# Altium PCB LineSensor32.PcbDoc (part 1 of 2)
Units mm, origin at the board's own origin, x right, y up, seen from the top; angles counter-clockwise.
Board outline 121.58 x 114.54 mm, 2 copper layers (Top Layer, Bottom Layer); 201 components, 111 nets, 642 pads, 221 vias.
Unrouted connection lines stored in the file: 4.
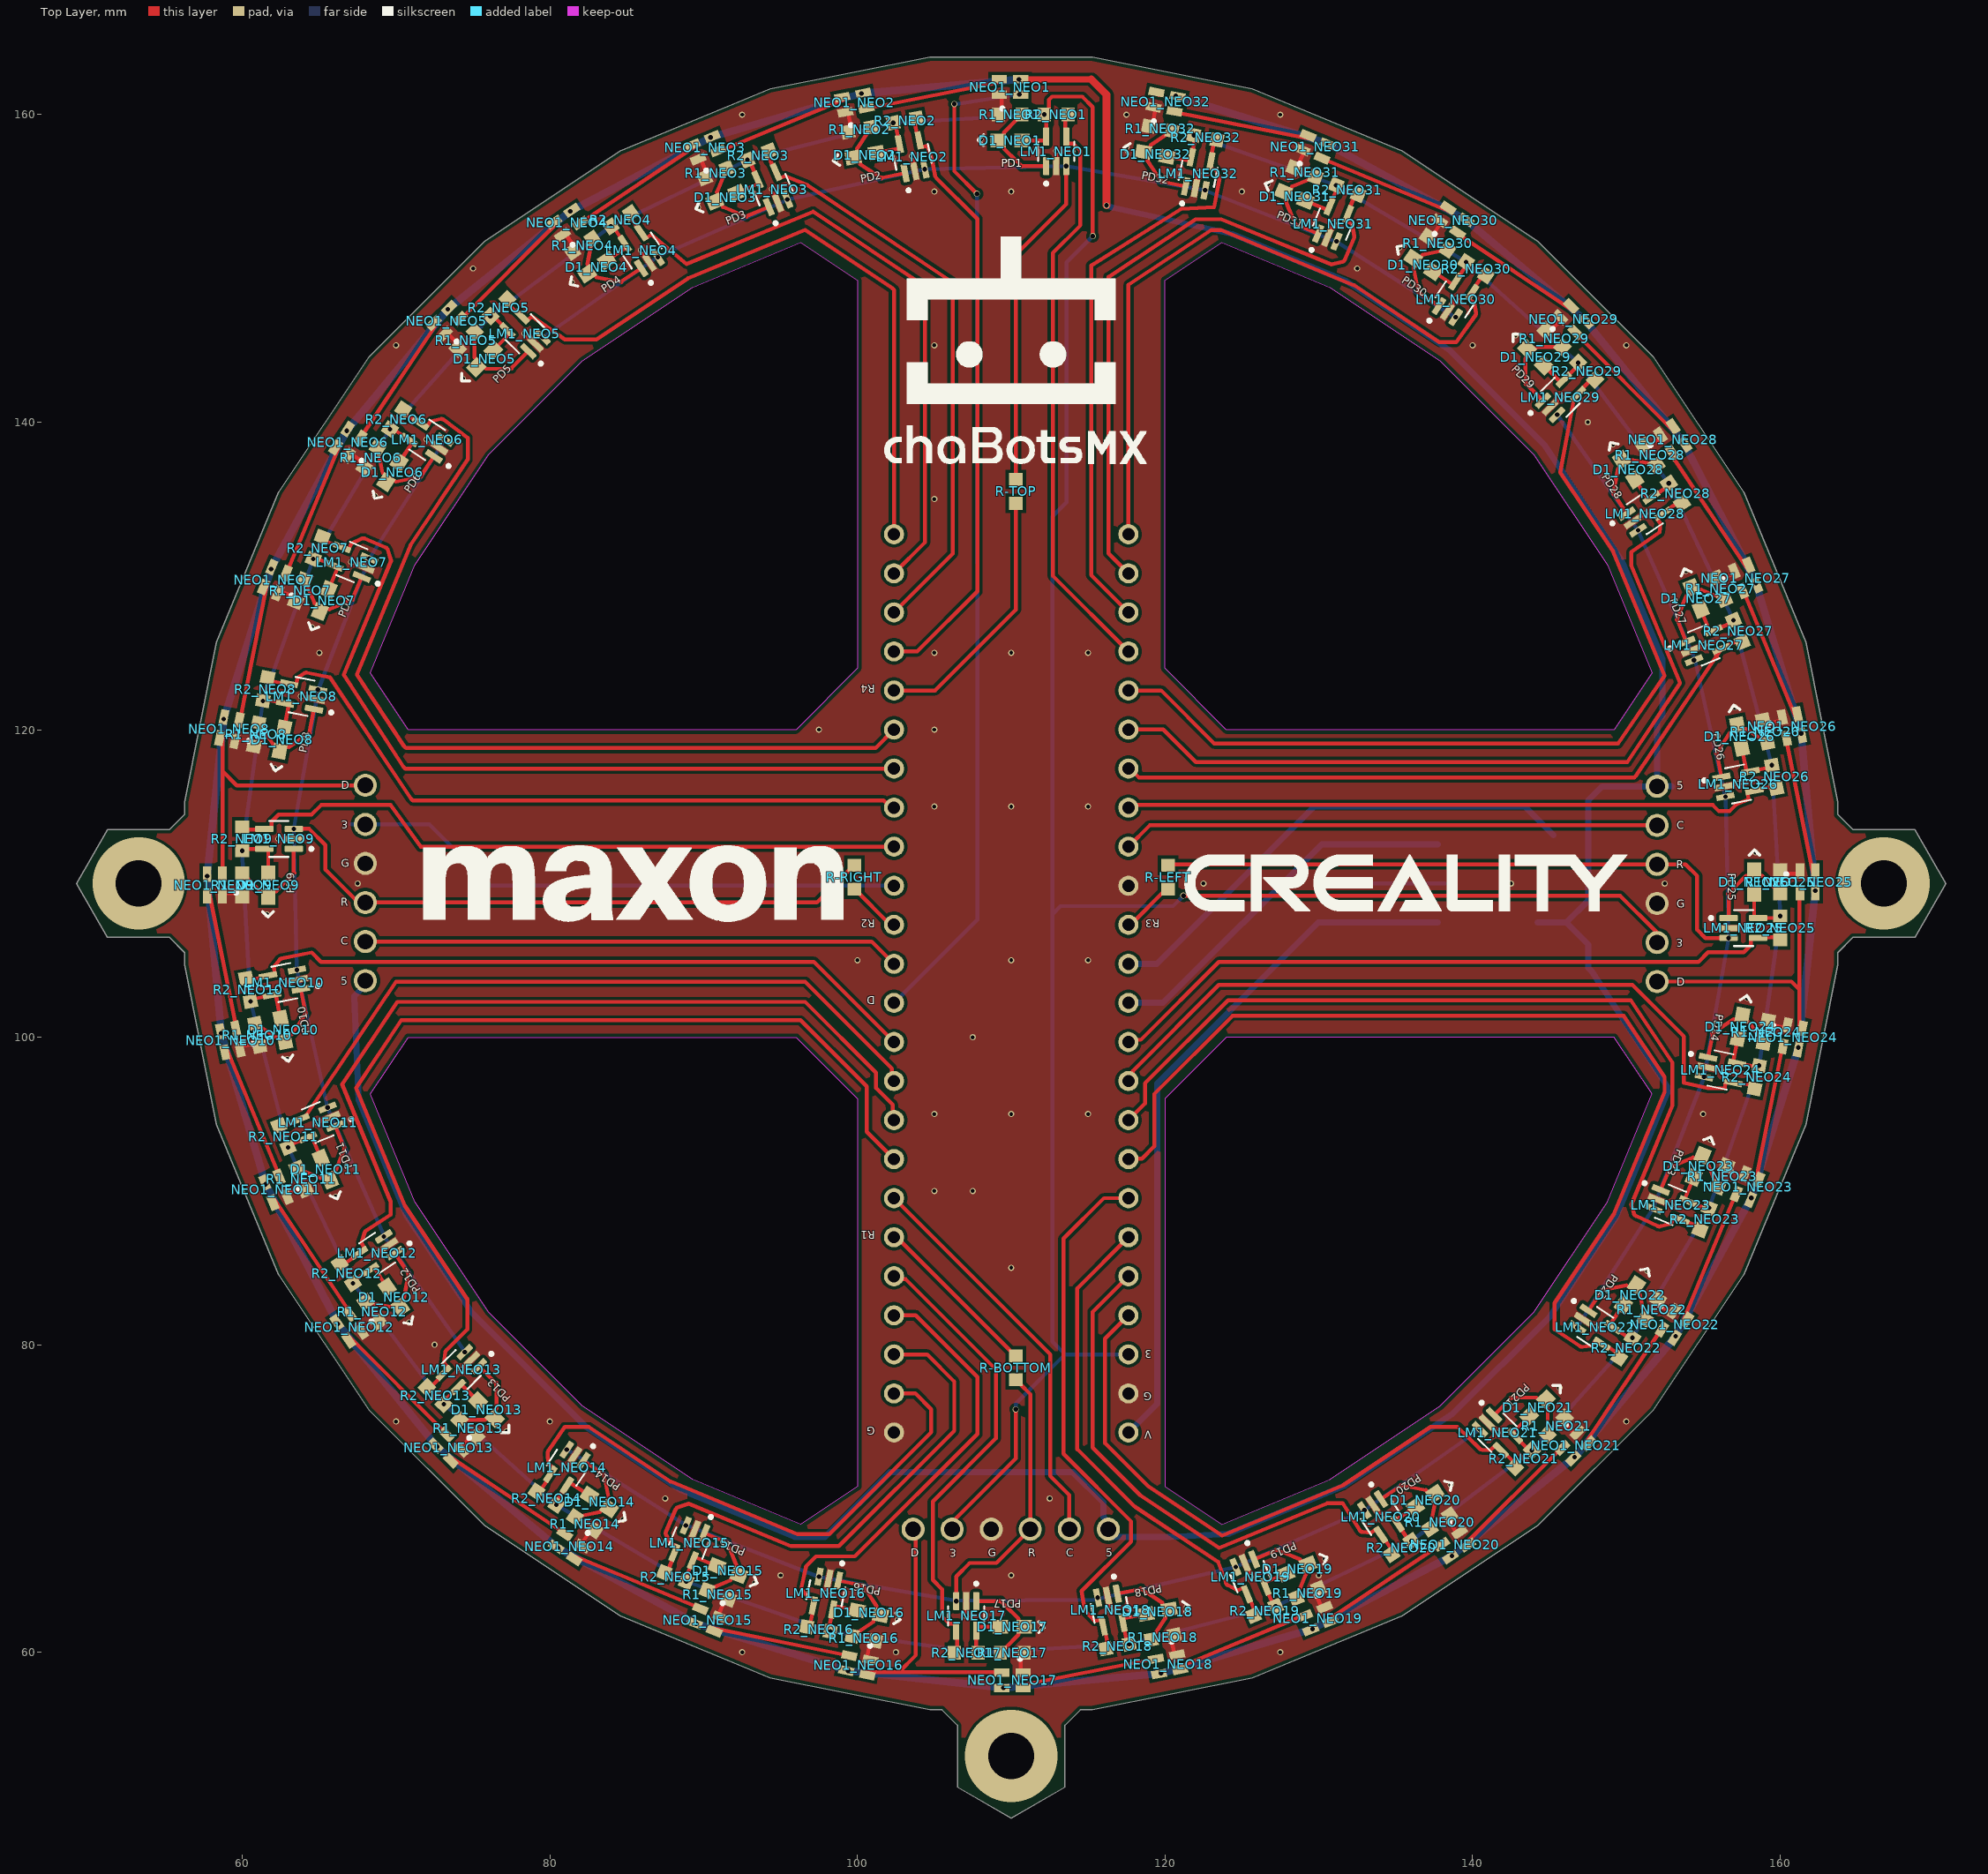
[diagram p0: Top Layer view]
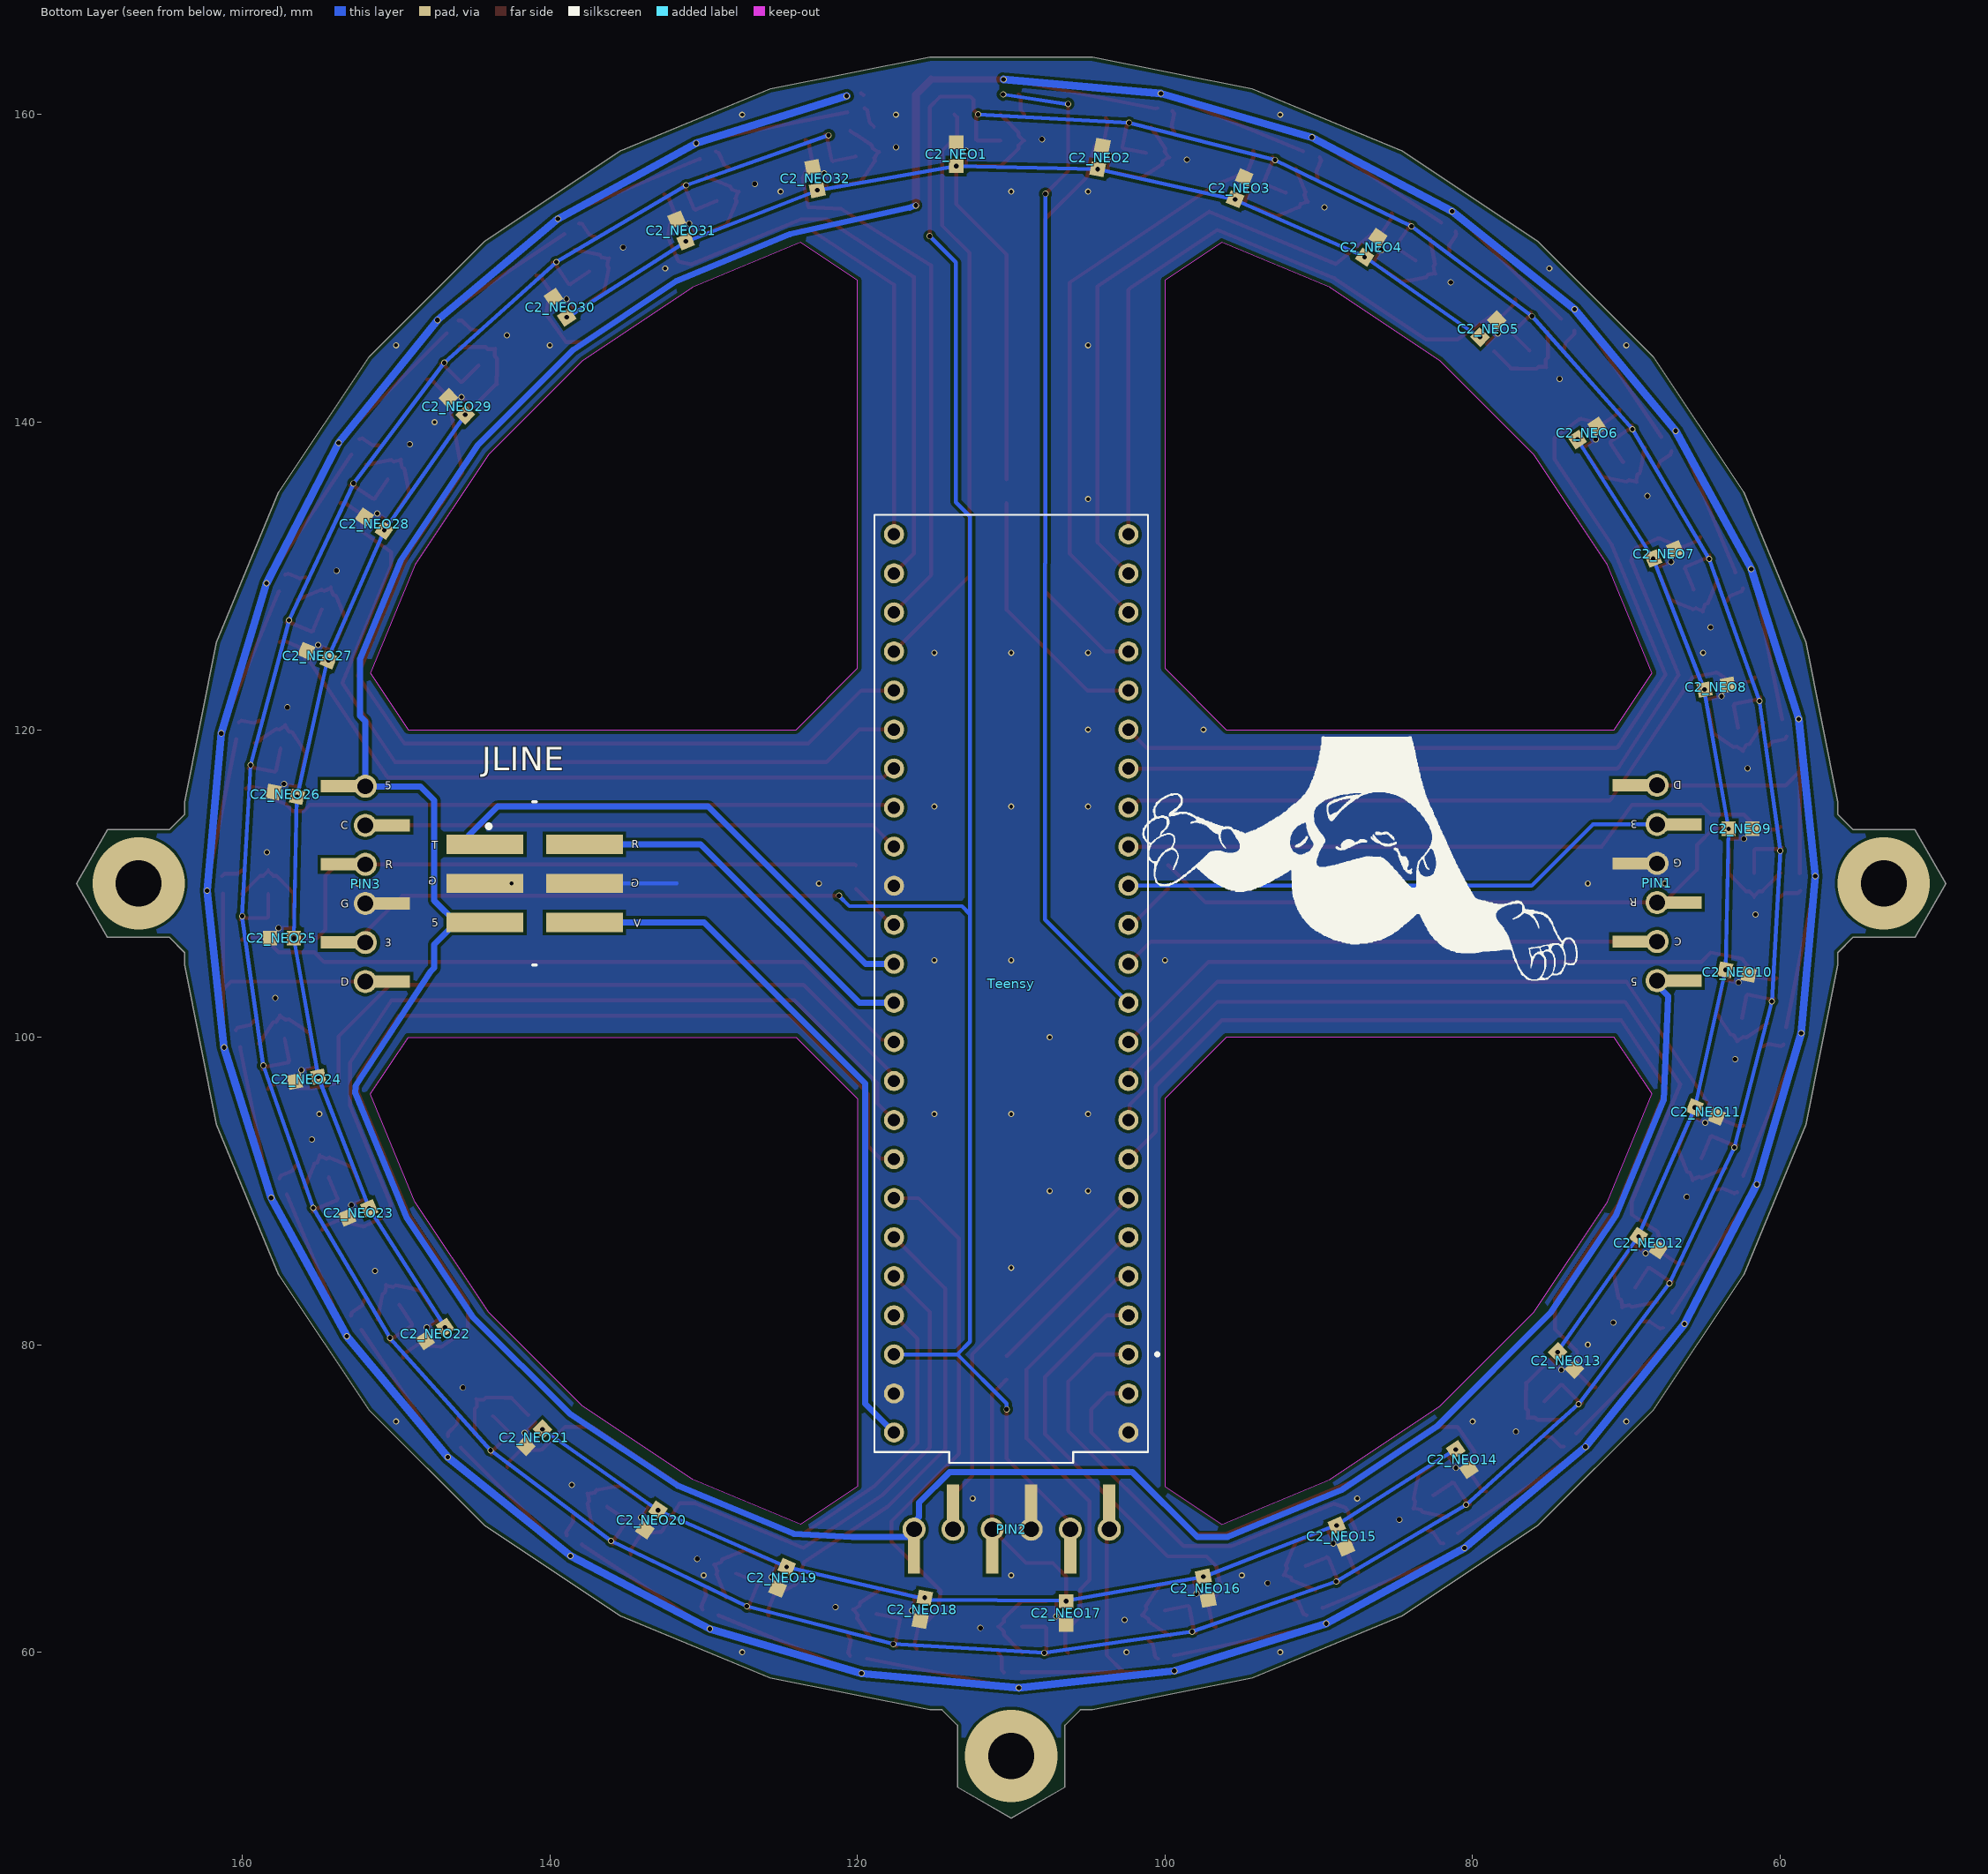
[diagram p1: Bottom Layer view, seen from below]

## Layer stack, top to bottom
Top Solder: solder mask 0.0102, Solder Resist, Dk 3.5
Top Layer: signal copper 0.0356
Dielectric 1: dielectric 0.32, FR-4, Dk 4.8
Bottom Layer: signal copper 0.0356
Bottom Solder: solder mask 0.0102, Solder Resist, Dk 3.5

## Board outline
58.316,94.322 56.25,104.706 56.25,105.5 55.25,106.5 51.229,106.5 49.209,110 51.229,113.5 55.25,113.5 56.25,114.5 56.25,115.294 58.316,125.678 62.367,135.46 68.25,144.264 75.736,151.75 84.54,157.633 94.322,161.684 104.706,163.75 115.294,163.75 125.678,161.684 135.46,157.633 144.264,151.75 151.75,144.264 157.633,135.46 161.684,125.678 163.75,115.294 163.75,114.5 164.75,113.5 168.771,113.5 170.791,110 168.771,106.5 164.75,106.5 163.75,105.5 163.75,104.706 161.684,94.322 157.633,84.54 151.75,75.736 144.264,68.25 135.46,62.367 125.678,58.316 115.294,56.25 114.5,56.25 113.5,55.25 113.5,51.229 110,49.209 106.5,51.229 106.5,55.25 105.5,56.25 104.706,56.25 94.322,58.316 84.54,62.367 75.736,68.25 68.25,75.736 62.367,84.54
cut-out: 124,120 120,124 120,149.216 123.692,151.683 130.723,148.771 137.889,143.983 143.983,137.889 148.771,130.723 151.683,123.692 149.216,120
cut-out: 76.017,82.111 71.229,89.277 68.317,96.308 70.784,100 96,100 100,96 100,70.784 96.308,68.317 89.277,71.229 82.111,76.017
cut-out: 70.784,120 68.317,123.692 71.229,130.723 76.017,137.889 82.111,143.983 89.277,148.771 96.308,151.683 100,149.216 100,124 96,120
cut-out: 120,70.784 123.692,68.317 130.723,71.229 137.889,76.017 143.983,82.111 148.771,89.277 151.683,96.308 149.216,100 124,100 120,96

## Design rules (kind name [scope] priority, off if disabled: settings)
BoardOutlineClearance [All] p1: gap=0.254 ignorepadtopadclearanceinfootprint=FALSE except(0: Arc-SplitContinuation Track-SplitContinuation SMDPad-SplitContinuation THPad-SplitContinuation Via-SplitContinuation Fill-SplitContinuation Poly-SplitContinuation Region-SplitContinuation Text-SplitContinuation)
Clearance [All] p1: gap=0.2 ignorepadtopadclearanceinfootprint=TRUE
PolygonConnect [All] p1: connectstyle=Relief reliefconductorwidth=0.5 reliefentries=4 polygonreliefangle="90 Angle" airgapwidth=0.254
RoomDefinition NEO1 [InComponentClass('NEO1')] p1: confinementstyle=ConfineIn formatcopy=TRUE lockcomponents=FALSE outline 107.425,155.016 114.725,155.016 114.725,163.116 107.425,163.116
RoomDefinition NEO18 [InComponentClass('NEO18')] p2: confinementstyle=ConfineIn formatcopy=TRUE lockcomponents=FALSE outline 121.332,66.356 114.173,64.932 115.753,56.988 122.912,58.412
RoomDefinition NEO4 [InComponentClass('NEO4')] p3: confinementstyle=ConfineIn formatcopy=TRUE lockcomponents=FALSE outline 82.812,145.957 88.882,150.012 84.381,156.747 78.312,152.691
RoomDefinition NEO5 [InComponentClass('NEO5')] p4: confinementstyle=ConfineIn formatcopy=TRUE lockcomponents=FALSE outline 76.328,140.025 81.49,145.187 75.762,150.914 70.6,145.752
RoomDefinition NEO32 [InComponentClass('NEO32')] p5: confinementstyle=ConfineIn formatcopy=TRUE lockcomponents=FALSE outline 116.262,154.678 123.421,153.254 125.002,161.198 117.842,162.622
RoomDefinition NEO31 [InComponentClass('NEO31')] p6: confinementstyle=ConfineIn formatcopy=TRUE lockcomponents=FALSE outline 124.857,152.598 131.602,149.804 134.702,157.288 127.957,160.081
RoomDefinition NEO30 [InComponentClass('NEO30')] p7: confinementstyle=ConfineIn formatcopy=TRUE lockcomponents=FALSE outline 132.882,148.881 138.952,144.825 143.452,151.56 137.383,155.616
RoomDefinition NEO29 [InComponentClass('NEO29')] p8: confinementstyle=ConfineIn formatcopy=TRUE lockcomponents=FALSE outline 139.993,143.67 145.155,138.508 150.882,144.235 145.72,149.397
RoomDefinition NEO28 [InComponentClass('NEO28')] p9: confinementstyle=ConfineIn formatcopy=TRUE lockcomponents=FALSE outline 145.985,137.171 150.041,131.102 156.776,135.602 152.72,141.671
RoomDefinition NEO27 [InComponentClass('NEO27')] p10: confinementstyle=ConfineIn formatcopy=TRUE lockcomponents=FALSE outline 150.535,129.577 153.328,122.833 160.812,125.933 158.018,132.677
RoomDefinition NEO26 [InComponentClass('NEO26')] p11: confinementstyle=ConfineIn formatcopy=TRUE lockcomponents=FALSE outline 153.639,121.357 155.063,114.197 163.007,115.777 161.583,122.937
RoomDefinition NEO25 [InComponentClass('NEO25')] p12: confinementstyle=ConfineIn formatcopy=TRUE lockcomponents=FALSE outline 155.016,112.6 155.016,105.3 163.116,105.3 163.116,112.6
RoomDefinition NEO24 [InComponentClass('NEO24')] p13: confinementstyle=ConfineIn formatcopy=TRUE lockcomponents=FALSE outline 154.658,103.768 153.234,96.608 161.178,95.028 162.603,102.188
RoomDefinition NEO23 [InComponentClass('NEO23')] p14: confinementstyle=ConfineIn formatcopy=TRUE lockcomponents=FALSE outline 152.584,95.175 149.791,88.431 157.274,85.331 160.068,92.075
RoomDefinition NEO22 [InComponentClass('NEO22')] p15: confinementstyle=ConfineIn formatcopy=TRUE lockcomponents=FALSE outline 148.874,87.152 144.818,81.083 151.553,76.582 155.609,82.652
RoomDefinition NEO21 [InComponentClass('NEO21')] p16: confinementstyle=ConfineIn formatcopy=TRUE lockcomponents=FALSE outline 143.67,80.007 138.508,74.845 144.235,69.118 149.397,74.28
RoomDefinition NEO20 [InComponentClass('NEO20')] p17: confinementstyle=ConfineIn formatcopy=TRUE lockcomponents=FALSE outline 137.171,74.015 131.102,69.959 135.602,63.224 141.671,67.28
RoomDefinition NEO19 [InComponentClass('NEO19')] p18: confinementstyle=ConfineIn formatcopy=TRUE lockcomponents=FALSE outline 129.652,69.415 122.908,66.622 126.007,59.138 132.752,61.932
RoomDefinition NEO17 [InComponentClass('NEO17')] p19: confinementstyle=ConfineIn formatcopy=TRUE lockcomponents=FALSE outline 112.575,64.959 105.275,64.959 105.275,56.859 112.575,56.859
RoomDefinition NEO16 [InComponentClass('NEO16')] p20: confinementstyle=ConfineIn formatcopy=TRUE lockcomponents=FALSE outline 103.856,65.298 96.702,66.751 95.09,58.813 102.244,57.36
RoomDefinition NEO15 [InComponentClass('NEO15')] p21: confinementstyle=ConfineIn formatcopy=TRUE lockcomponents=FALSE outline 95.143,67.402 88.398,70.196 85.298,62.712 92.043,59.919
RoomDefinition NEO14 [InComponentClass('NEO14')] p22: confinementstyle=ConfineIn formatcopy=TRUE lockcomponents=FALSE outline 87.118,71.119 81.048,75.175 76.548,68.44 82.617,64.384
RoomDefinition NEO13 [InComponentClass('NEO13')] p23: confinementstyle=ConfineIn formatcopy=TRUE lockcomponents=FALSE outline 79.972,76.33 74.81,81.492 69.083,75.765 74.244,70.603
RoomDefinition NEO12 [InComponentClass('NEO12')] p24: confinementstyle=ConfineIn formatcopy=TRUE lockcomponents=FALSE outline 73.98,82.836 69.925,88.905 63.19,84.405 67.245,78.335
RoomDefinition NEO11 [InComponentClass('NEO11')] p25: confinementstyle=ConfineIn formatcopy=TRUE lockcomponents=FALSE outline 69.406,90.371 66.612,97.115 59.129,94.016 61.922,87.271
RoomDefinition NEO10 [InComponentClass('NEO10')] p26: confinementstyle=ConfineIn formatcopy=TRUE lockcomponents=FALSE outline 66.356,98.668 64.932,105.827 56.988,104.247 58.412,97.088
RoomDefinition NEO9 [InComponentClass('NEO9')] p27: confinementstyle=ConfineIn formatcopy=TRUE lockcomponents=FALSE outline 64.984,107.4 64.984,114.7 56.884,114.7 56.884,107.4
RoomDefinition NEO8 [InComponentClass('NEO8')] p28: confinementstyle=ConfineIn formatcopy=TRUE lockcomponents=FALSE outline 65.322,116.262 66.746,123.421 58.802,125.002 57.378,117.842
RoomDefinition NEO7 [InComponentClass('NEO7')] p29: confinementstyle=ConfineIn formatcopy=TRUE lockcomponents=FALSE outline 67.416,124.825 70.209,131.569 62.726,134.669 59.932,127.925
RoomDefinition NEO6 [InComponentClass('NEO6')] p30: confinementstyle=ConfineIn formatcopy=TRUE lockcomponents=FALSE outline 71.125,132.837 75.182,138.906 68.448,143.408 64.391,137.339
RoomDefinition NEO3 [InComponentClass('NEO3')] p31: confinementstyle=ConfineIn formatcopy=TRUE lockcomponents=FALSE outline 90.385,150.627 97.129,153.42 94.029,160.904 87.285,158.11
RoomDefinition NEO2 [InComponentClass('NEO2')] p32: confinementstyle=ConfineIn formatcopy=TRUE lockcomponents=FALSE outline 98.668,153.644 105.827,155.068 104.247,163.013 97.087,161.588
RoutingVias [All] p1: holewidth=0.711 width=1.27 viastyle="Through Hole" minholewidth=0.711 minwidth=1.27 maxholewidth=0.711 maxwidth=1.27
SolderMaskExpansion [All] p1: expansion=0.102 istentingtop=FALSE
SupplyNets "Schematic Supply Nets_5" [InNet('+BAT')] p1: voltage=0.000
SupplyNets "Schematic Supply Nets_4" [InNet('+3V3')] p2: voltage=0.000
SupplyNets "Schematic Supply Nets_2" [InNet('+VREF')] p3: voltage=0.000
SupplyNets "Schematic Supply Nets_1" [InNet('GND')] p4: voltage=0.000
SupplyNets "Schematic Supply Nets" [InNet('+5V')] p5: voltage=0.000
Width [All] p1: maxlimit=1 minlimit=0.254 preferedwidth=0.254
30 further rules are at their usual default settings.

## Classes and differential pairs
net class COMP[1..32]: COMP1 COMP2 COMP3 COMP4 COMP5 COMP6 COMP7 COMP8 COMP9 COMP10 COMP11 COMP12 COMP13 COMP14 COMP15 COMP16 COMP17 COMP18 COMP19 COMP20 COMP21 COMP22 COMP23 COMP24 COMP25 COMP26 COMP27 COMP28 COMP29 COMP30 COMP31 COMP32
component class Main: JLINE PIN1 PIN2 PIN3 R-BOTTOM R-LEFT R-RIGHT R-TOP Teensy
net class DIN[2..32]: DIN2 DIN3 DIN4 DIN5 DIN6 DIN7 DIN8 DIN9 DIN10 DIN11 DIN12 DIN13 DIN14 DIN15 DIN16 DIN17 DIN18 DIN19 DIN20 DIN21 DIN22 DIN23 DIN24 DIN25 DIN26 DIN27 DIN28 DIN29 DIN30 DIN31 DIN32
component class NEO32: C2_NEO32 D1_NEO32 LM1_NEO32 NEO1_NEO32 R1_NEO32 R2_NEO32
component class NEO31: C2_NEO31 D1_NEO31 LM1_NEO31 NEO1_NEO31 R1_NEO31 R2_NEO31
component class NEO30: C2_NEO30 D1_NEO30 LM1_NEO30 NEO1_NEO30 R1_NEO30 R2_NEO30
component class NEO29: C2_NEO29 D1_NEO29 LM1_NEO29 NEO1_NEO29 R1_NEO29 R2_NEO29
component class NEO28: C2_NEO28 D1_NEO28 LM1_NEO28 NEO1_NEO28 R1_NEO28 R2_NEO28
component class NEO27: C2_NEO27 D1_NEO27 LM1_NEO27 NEO1_NEO27 R1_NEO27 R2_NEO27
component class NEO26: C2_NEO26 D1_NEO26 LM1_NEO26 NEO1_NEO26 R1_NEO26 R2_NEO26
component class NEO25: C2_NEO25 D1_NEO25 LM1_NEO25 NEO1_NEO25 R1_NEO25 R2_NEO25
component class NEO24: C2_NEO24 D1_NEO24 LM1_NEO24 NEO1_NEO24 R1_NEO24 R2_NEO24
component class NEO23: C2_NEO23 D1_NEO23 LM1_NEO23 NEO1_NEO23 R1_NEO23 R2_NEO23
component class NEO22: C2_NEO22 D1_NEO22 LM1_NEO22 NEO1_NEO22 R1_NEO22 R2_NEO22
component class NEO21: C2_NEO21 D1_NEO21 LM1_NEO21 NEO1_NEO21 R1_NEO21 R2_NEO21
component class NEO20: C2_NEO20 D1_NEO20 LM1_NEO20 NEO1_NEO20 R1_NEO20 R2_NEO20
component class NEO19: C2_NEO19 D1_NEO19 LM1_NEO19 NEO1_NEO19 R1_NEO19 R2_NEO19
component class NEO18: C2_NEO18 D1_NEO18 LM1_NEO18 NEO1_NEO18 R1_NEO18 R2_NEO18
component class NEO17: C2_NEO17 D1_NEO17 LM1_NEO17 NEO1_NEO17 R1_NEO17 R2_NEO17
component class NEO16: C2_NEO16 D1_NEO16 LM1_NEO16 NEO1_NEO16 R1_NEO16 R2_NEO16
component class NEO15: C2_NEO15 D1_NEO15 LM1_NEO15 NEO1_NEO15 R1_NEO15 R2_NEO15
component class NEO14: C2_NEO14 D1_NEO14 LM1_NEO14 NEO1_NEO14 R1_NEO14 R2_NEO14
component class NEO13: C2_NEO13 D1_NEO13 LM1_NEO13 NEO1_NEO13 R1_NEO13 R2_NEO13
component class NEO12: C2_NEO12 D1_NEO12 LM1_NEO12 NEO1_NEO12 R1_NEO12 R2_NEO12
component class NEO11: C2_NEO11 D1_NEO11 LM1_NEO11 NEO1_NEO11 R1_NEO11 R2_NEO11
component class NEO10: C2_NEO10 D1_NEO10 LM1_NEO10 NEO1_NEO10 R1_NEO10 R2_NEO10
component class NEO9: C2_NEO9 D1_NEO9 LM1_NEO9 NEO1_NEO9 R1_NEO9 R2_NEO9
component class NEO8: C2_NEO8 D1_NEO8 LM1_NEO8 NEO1_NEO8 R1_NEO8 R2_NEO8
component class NEO7: C2_NEO7 D1_NEO7 LM1_NEO7 NEO1_NEO7 R1_NEO7 R2_NEO7
component class NEO6: C2_NEO6 D1_NEO6 LM1_NEO6 NEO1_NEO6 R1_NEO6 R2_NEO6
component class NEO5: C2_NEO5 D1_NEO5 LM1_NEO5 NEO1_NEO5 R1_NEO5 R2_NEO5
component class NEO4: C2_NEO4 D1_NEO4 LM1_NEO4 NEO1_NEO4 R1_NEO4 R2_NEO4
channel class Neopixels: NEO1 NEO2 NEO3 NEO4 NEO5 NEO6 NEO7 NEO8 NEO9 NEO10 NEO11 NEO12 NEO13 NEO14 NEO15 NEO16 NEO17 NEO18 NEO19 NEO20 NEO21 NEO22 NEO23 NEO24 NEO25 NEO26 NEO27 NEO28 NEO29 NEO30 NEO31 NEO32
component class NEO3: C2_NEO3 D1_NEO3 LM1_NEO3 NEO1_NEO3 R1_NEO3 R2_NEO3
component class NEO2: C2_NEO2 D1_NEO2 LM1_NEO2 NEO1_NEO2 R1_NEO2 R2_NEO2
component class NEO1: C2_NEO1 D1_NEO1 LM1_NEO1 NEO1_NEO1 R1_NEO1 R2_NEO1

## Components (designator, comment, footprint, x,y, rotation, side; value= is the part's Value field where it differs from the comment)
C2_NEO1 "1UF" CAP_0603 113.575,157.431 r270 bottom (schematic designator C2)
C2_NEO2 "1UF" CAP_0603 104.228,157.213 r281.25 bottom (schematic designator C2)
C2_NEO3 "1UF" CAP_0603 95.142,155.212 r292.5 bottom (schematic designator C2)
C2_NEO4 "1UF" CAP_0603 86.584,151.381 r303.75 bottom (schematic designator C2)
C2_NEO5 "1UF" CAP_0603 78.969,146.081 r315 bottom (schematic designator C2)
C2_NEO6 "1UF" CAP_0603 72.535,139.292 r326.24 bottom (schematic designator C2)
C2_NEO7 "1UF" CAP_0603 67.538,131.431 r337.5 bottom (schematic designator C2)
C2_NEO8 "1UF" CAP_0603 64.153,122.765 r348.75 bottom (schematic designator C2)
C2_NEO9 "1UF" CAP_0603 62.569,113.55 r0 bottom (schematic designator C2)
C2_NEO10 "1UF" CAP_0603 62.788,104.228 r11.25 bottom (schematic designator C2)
C2_NEO11 "1UF" CAP_0603 64.821,95.129 r22.5 bottom (schematic designator C2)
C2_NEO12 "1UF" CAP_0603 68.556,86.607 r33.75 bottom (schematic designator C2)
C2_NEO13 "1UF" CAP_0603 73.916,78.971 r45 bottom (schematic designator C2)
C2_NEO14 "1UF" CAP_0603 80.662,72.528 r56.25 bottom (schematic designator C2)
C2_NEO15 "1UF" CAP_0603 88.537,67.524 r67.5 bottom (schematic designator C2)
C2_NEO16 "1UF" CAP_0603 97.349,64.156 r78.52 bottom (schematic designator C2)
C2_NEO17 "1UF" CAP_0603 106.425,62.544 r90 bottom (schematic designator C2)
C2_NEO18 "1UF" CAP_0603 115.772,62.788 r101.25 bottom (schematic designator C2)
C2_NEO19 "1UF" CAP_0603 124.894,64.831 r112.5 bottom (schematic designator C2)
C2_NEO20 "1UF" CAP_0603 133.4,68.59 r123.75 bottom (schematic designator C2)
C2_NEO21 "1UF" CAP_0603 141.029,73.951 r135 bottom (schematic designator C2)
C2_NEO22 "1UF" CAP_0603 147.465,80.697 r146.25 bottom (schematic designator C2)
C2_NEO23 "1UF" CAP_0603 152.462,88.569 r157.5 bottom (schematic designator C2)
C2_NEO24 "1UF" CAP_0603 155.827,97.265 r168.75 bottom (schematic designator C2)
C2_NEO25 "1UF" CAP_0603 157.431,106.45 r180 bottom (schematic designator C2)
C2_NEO26 "1UF" CAP_0603 157.207,115.796 r191.25 bottom (schematic designator C2)
C2_NEO27 "1UF" CAP_0603 155.119,124.819 r202.5 bottom (schematic designator C2)
C2_NEO28 "1UF" CAP_0603 151.41,133.4 r213.75 bottom (schematic designator C2)
C2_NEO29 "1UF" CAP_0603 146.049,141.029 r225 bottom (schematic designator C2)
C2_NEO30 "1UF" CAP_0603 139.338,147.472 r236.25 bottom (schematic designator C2)
C2_NEO31 "1UF" CAP_0603 131.464,152.476 r247.5 bottom (schematic designator C2)
C2_NEO32 "1UF" CAP_0603 122.765,155.847 r258.75 bottom (schematic designator C2)
D1_NEO1 "ALS-PT19" ALS-PT19 109.925,158.316 r180 top (schematic designator D1)
D1_NEO2 "ALS-PT19" ALS-PT19 100.476,157.368 r191.25 top (schematic designator D1)
D1_NEO3 "ALS-PT19" ALS-PT19 91.431,154.632 r202.5 top (schematic designator D1)
D1_NEO4 "ALS-PT19" ALS-PT19 83.057,150.089 r213.75 top (schematic designator D1)
D1_NEO5 "ALS-PT19" ALS-PT19 75.762,144.126 r225 top (schematic designator D1)
D1_NEO6 "ALS-PT19" ALS-PT19 69.771,136.75 r236.24 top (schematic designator D1)
D1_NEO7 "ALS-PT19" ALS-PT19 65.324,128.397 r247.5 top (schematic designator D1)
D1_NEO8 "ALS-PT19" ALS-PT19 62.573,119.357 r258.75 top (schematic designator D1)
D1_NEO9 "ALS-PT19" ALS-PT19 61.684,109.9 r270 top (schematic designator D1)
D1_NEO10 "ALS-PT19" ALS-PT19 62.632,100.476 r281.25 top (schematic designator D1)
D1_NEO11 "ALS-PT19" ALS-PT19 65.4,91.418 r292.5 top (schematic designator D1)
D1_NEO12 "ALS-PT19" ALS-PT19 69.848,83.081 r303.75 top (schematic designator D1)
D1_NEO13 "ALS-PT19" ALS-PT19 75.871,75.765 r315 top (schematic designator D1)
D1_NEO14 "ALS-PT19" ALS-PT19 83.206,69.764 r326.25 top (schematic designator D1)
D1_NEO15 "ALS-PT19" ALS-PT19 91.57,65.31 r337.5 top (schematic designator D1)
D1_NEO16 "ALS-PT19" ALS-PT19 100.749,62.562 r348.52 top (schematic designator D1)
D1_NEO17 "ALS-PT19" ALS-PT19 110.075,61.659 r0 top (schematic designator D1)
D1_NEO18 "ALS-PT19" ALS-PT19 119.524,62.632 r11.25 top (schematic designator D1)
D1_NEO19 "ALS-PT19" ALS-PT19 128.605,65.41 r22.5 top (schematic designator D1)
D1_NEO20 "ALS-PT19" ALS-PT19 136.926,69.882 r33.75 top (schematic designator D1)
D1_NEO21 "ALS-PT19" ALS-PT19 144.235,75.906 r45 top (schematic designator D1)
D1_NEO22 "ALS-PT19" ALS-PT19 150.229,83.24 r56.25 top (schematic designator D1)
D1_NEO23 "ALS-PT19" ALS-PT19 154.676,91.603 r67.5 top (schematic designator D1)
D1_NEO24 "ALS-PT19" ALS-PT19 157.407,100.672 r78.75 top (schematic designator D1)
D1_NEO25 "ALS-PT19" ALS-PT19 158.316,110.1 r90 top (schematic designator D1)
D1_NEO26 "ALS-PT19" ALS-PT19 157.363,119.549 r101.25 top (schematic designator D1)
D1_NEO27 "ALS-PT19" ALS-PT19 154.54,128.53 r112.5 top (schematic designator D1)
D1_NEO28 "ALS-PT19" ALS-PT19 150.118,136.926 r123.75 top (schematic designator D1)
D1_NEO29 "ALS-PT19" ALS-PT19 144.094,144.235 r135 top (schematic designator D1)
D1_NEO30 "ALS-PT19" ALS-PT19 136.794,150.236 r146.25 top (schematic designator D1)
D1_NEO31 "ALS-PT19" ALS-PT19 128.43,154.69 r157.5 top (schematic designator D1)
D1_NEO32 "ALS-PT19" ALS-PT19 119.357,157.427 r168.75 top (schematic designator D1)
JLINE "IDC-6PIN-SMT-2.54_1_1" IDC-6PIN-SMT-2.54 141,110 r180 bottom
LM1_NEO1 "LMV331" LMV331 112.925,157.616 r90 top (schematic designator LM1)
LM1_NEO2 "LMV331" LMV331 103.555,157.267 r101.25 top (schematic designator LM1)
LM1_NEO3 "LMV331" LMV331 94.471,155.134 r112.5 top (schematic designator LM1)
LM1_NEO4 "LMV331" LMV331 85.94,151.174 r123.75 top (schematic designator LM1)
LM1_NEO5 "LMV331" LMV331 78.378,145.752 r135 top (schematic designator LM1)
LM1_NEO6 "LMV331" LMV331 72.02,138.855 r146.24 top (schematic designator LM1)
LM1_NEO7 "LMV331" LMV331 67.118,130.901 r157.5 top (schematic designator LM1)
LM1_NEO8 "LMV331" LMV331 63.845,122.163 r168.75 top (schematic designator LM1)
LM1_NEO9 "LMV331" LMV331 62.384,112.9 r180 top (schematic designator LM1)
LM1_NEO10 "LMV331" LMV331 62.733,103.555 r191.25 top (schematic designator LM1)
LM1_NEO11 "LMV331" LMV331 64.899,94.457 r202.5 top (schematic designator LM1)
LM1_NEO12 "LMV331" LMV331 68.763,85.964 r213.75 top (schematic designator LM1)
LM1_NEO13 "LMV331" LMV331 74.244,78.381 r225 top (schematic designator LM1)
LM1_NEO14 "LMV331" LMV331 81.1,72.013 r236.25 top (schematic designator LM1)
LM1_NEO15 "LMV331" LMV331 89.066,67.105 r247.5 top (schematic designator LM1)
LM1_NEO16 "LMV331" LMV331 97.949,63.845 r258.52 top (schematic designator LM1)
LM1_NEO17 "LMV331" LMV331 107.075,62.359 r270 top (schematic designator LM1)
LM1_NEO18 "LMV331" LMV331 116.445,62.733 r281.25 top (schematic designator LM1)
LM1_NEO19 "LMV331" LMV331 125.566,64.908 r292.5 top (schematic designator LM1)
LM1_NEO20 "LMV331" LMV331 134.043,68.798 r303.75 top (schematic designator LM1)
LM1_NEO21 "LMV331" LMV331 141.619,74.28 r315 top (schematic designator LM1)
LM1_NEO22 "LMV331" LMV331 147.98,81.135 r326.25 top (schematic designator LM1)
LM1_NEO23 "LMV331" LMV331 152.882,89.099 r337.5 top (schematic designator LM1)
LM1_NEO24 "LMV331" LMV331 156.135,97.866 r348.75 top (schematic designator LM1)
LM1_NEO25 "LMV331" LMV331 157.616,107.1 r0 top (schematic designator LM1)
LM1_NEO26 "LMV331" LMV331 157.262,116.47 r11.25 top (schematic designator LM1)
LM1_NEO27 "LMV331" LMV331 155.042,125.491 r22.5 top (schematic designator LM1)
LM1_NEO28 "LMV331" LMV331 151.202,134.043 r33.75 top (schematic designator LM1)
LM1_NEO29 "LMV331" LMV331 145.72,141.619 r45 top (schematic designator LM1)
LM1_NEO30 "LMV331" LMV331 138.9,147.987 r56.25 top (schematic designator LM1)
LM1_NEO31 "LMV331" LMV331 130.934,152.895 r67.5 top (schematic designator LM1)
LM1_NEO32 "LMV331" LMV331 122.163,156.155 r78.75 top (schematic designator LM1)
NEO1_NEO1 "LED1515" LED1515 109.925,161.8 r90 top (schematic designator NEO1)
NEO1_NEO2 "LED1515" LED1515 99.796,160.785 r101.25 top (schematic designator NEO1)
NEO1_NEO3 "LED1515" LED1515 90.098,157.851 r112.5 top (schematic designator NEO1)
NEO1_NEO4 "LED1515" LED1515 81.122,152.986 r123.75 top (schematic designator NEO1)
NEO1_NEO5 "LED1515" LED1515 73.298,146.589 r135 top (schematic designator NEO1)
NEO1_NEO6 "LED1515" LED1515 66.874,138.686 r146.24 top (schematic designator NEO1)
NEO1_NEO7 "LED1515" LED1515 62.105,129.731 r157.5 top (schematic designator NEO1)
NEO1_NEO8 "LED1515" LED1515 59.156,120.037 r168.75 top (schematic designator NEO1)
NEO1_NEO9 "LED1515" LED1515 58.2,109.9 r180 top (schematic designator NEO1)
NEO1_NEO10 "LED1515" LED1515 59.215,99.796 r191.25 top (schematic designator NEO1)
NEO1_NEO11 "LED1515" LED1515 62.181,90.085 r202.5 top (schematic designator NEO1)
NEO1_NEO12 "LED1515" LED1515 66.951,81.145 r213.75 top (schematic designator NEO1)
NEO1_NEO13 "LED1515" LED1515 73.407,73.301 r225 top (schematic designator NEO1)
NEO1_NEO14 "LED1515" LED1515 81.27,66.867 r236.25 top (schematic designator NEO1)
NEO1_NEO15 "LED1515" LED1515 90.237,62.091 r247.5 top (schematic designator NEO1)
NEO1_NEO16 "LED1515" LED1515 100.056,59.148 r258.52 top (schematic designator NEO1)
NEO1_NEO17 "LED1515" LED1515 110.075,58.175 r270 top (schematic designator NEO1)
NEO1_NEO18 "LED1515" LED1515 120.204,59.215 r281.25 top (schematic designator NEO1)
NEO1_NEO19 "LED1515" LED1515 129.938,62.191 r292.5 top (schematic designator NEO1)
NEO1_NEO20 "LED1515" LED1515 138.862,66.985 r303.75 top (schematic designator NEO1)
NEO1_NEO21 "LED1515" LED1515 146.699,73.443 r315 top (schematic designator NEO1)
NEO1_NEO22 "LED1515" LED1515 153.126,81.305 r326.25 top (schematic designator NEO1)
NEO1_NEO23 "LED1515" LED1515 157.895,90.269 r337.5 top (schematic designator NEO1)
NEO1_NEO24 "LED1515" LED1515 160.824,99.992 r348.75 top (schematic designator NEO1)
NEO1_NEO25 "LED1515" LED1515 161.8,110.1 r0 top (schematic designator NEO1)
NEO1_NEO26 "LED1515" LED1515 160.78,120.228 r11.25 top (schematic designator NEO1)
NEO1_NEO27 "LED1515" LED1515 157.759,129.864 r22.5 top (schematic designator NEO1)
NEO1_NEO28 "LED1515" LED1515 153.015,138.862 r33.75 top (schematic designator NEO1)
NEO1_NEO29 "LED1515" LED1515 146.557,146.699 r45 top (schematic designator NEO1)
NEO1_NEO30 "LED1515" LED1515 138.73,153.133 r56.25 top (schematic designator NEO1)
NEO1_NEO31 "LED1515" LED1515 129.763,157.909 r67.5 top (schematic designator NEO1)
NEO1_NEO32 "LED1515" LED1515 120.037,160.844 r78.75 top (schematic designator NEO1)
PIN1 "6PIN" 6PIN 68,110 r270 bottom
PIN2 "6PIN" 6PIN 110,68 r0 bottom
PIN3 "6PIN" 6PIN 152,110 r90 bottom
R1_NEO1 "10KΩ" RES_0603 109.925,160.016 r0 top (schematic designator R1)
R1_NEO2 "10KΩ" RES_0603 100.144,159.036 r11.25 top (schematic designator R1)
R1_NEO3 "10KΩ" RES_0603 90.781,156.203 r22.5 top (schematic designator R1)
R1_NEO4 "10KΩ" RES_0603 82.113,151.503 r33.75 top (schematic designator R1)
R1_NEO5 "10KΩ" RES_0603 74.56,145.328 r45 top (schematic designator R1)
R1_NEO6 "10KΩ" RES_0603 68.357,137.695 r56.24 top (schematic designator R1)
R1_NEO7 "10KΩ" RES_0603 63.753,129.048 r67.5 top (schematic designator R1)
R1_NEO8 "10KΩ" RES_0603 60.906,119.689 r78.75 top (schematic designator R1)
R1_NEO9 "10KΩ" RES_0603 59.984,109.9 r90 top (schematic designator R1)
R1_NEO10 "10KΩ" RES_0603 60.965,100.144 r101.25 top (schematic designator R1)
R1_NEO11 "10KΩ" RES_0603 63.83,90.767 r112.5 top (schematic designator R1)
R1_NEO12 "10KΩ" RES_0603 68.434,82.136 r123.75 top (schematic designator R1)
R1_NEO13 "10KΩ" RES_0603 74.669,74.563 r135 top (schematic designator R1)
R1_NEO14 "10KΩ" RES_0603 82.261,68.351 r146.25 top (schematic designator R1)
R1_NEO15 "10KΩ" RES_0603 90.919,63.739 r157.5 top (schematic designator R1)
R1_NEO16 "10KΩ" RES_0603 100.411,60.896 r168.52 top (schematic designator R1)
R1_NEO17 "10KΩ" RES_0603 110.075,59.959 r180 top (schematic designator R1)
R1_NEO18 "10KΩ" RES_0603 119.856,60.965 r191.25 top (schematic designator R1)
R1_NEO19 "10KΩ" RES_0603 129.256,63.839 r202.5 top (schematic designator R1)
R1_NEO20 "10KΩ" RES_0603 137.871,68.469 r213.75 top (schematic designator R1)
R1_NEO21 "10KΩ" RES_0603 145.437,74.704 r225 top (schematic designator R1)
R1_NEO22 "10KΩ" RES_0603 151.642,82.296 r236.25 top (schematic designator R1)
R1_NEO23 "10KΩ" RES_0603 156.247,90.952 r247.5 top (schematic designator R1)
R1_NEO24 "10KΩ" RES_0603 159.074,100.34 r258.75 top (schematic designator R1)
R1_NEO25 "10KΩ" RES_0603 160.016,110.1 r270 top (schematic designator R1)
R1_NEO26 "10KΩ" RES_0603 159.031,119.88 r281.25 top (schematic designator R1)
R1_NEO27 "10KΩ" RES_0603 156.111,129.181 r292.5 top (schematic designator R1)
R1_NEO28 "10KΩ" RES_0603 151.531,137.871 r303.75 top (schematic designator R1)
R1_NEO29 "10KΩ" RES_0603 145.296,145.437 r315 top (schematic designator R1)
R1_NEO30 "10KΩ" RES_0603 137.739,151.649 r326.25 top (schematic designator R1)
R1_NEO31 "10KΩ" RES_0603 129.081,156.261 r337.5 top (schematic designator R1)
R1_NEO32 "10KΩ" RES_0603 119.689,159.094 r348.75 top (schematic designator R1)
R2_NEO1 "4.7KΩ" RES_0603 112.925,160.016 r180 top (schematic designator R2)
R2_NEO2 "4.7KΩ" RES_0603 103.086,159.621 r191.25 top (schematic designator R2)
R2_NEO3 "4.7KΩ" RES_0603 93.552,157.351 r202.5 top (schematic designator R2)
R2_NEO4 "4.7KΩ" RES_0603 84.607,153.169 r213.75 top (schematic designator R2)
R2_NEO5 "4.7KΩ" RES_0603 76.681,147.449 r225 top (schematic designator R2)
R2_NEO6 "4.7KΩ" RES_0603 70.025,140.189 r236.24 top (schematic designator R2)
R2_NEO7 "4.7KΩ" RES_0603 64.901,131.82 r247.5 top (schematic designator R2)
R2_NEO8 "4.7KΩ" RES_0603 61.491,122.631 r258.75 top (schematic designator R2)
R2_NEO9 "4.7KΩ" RES_0603 59.984,112.9 r270 top (schematic designator R2)
R2_NEO10 "4.7KΩ" RES_0603 60.379,103.087 r281.25 top (schematic designator R2)
R2_NEO11 "4.7KΩ" RES_0603 62.681,93.539 r292.5 top (schematic designator R2)
R2_NEO12 "4.7KΩ" RES_0603 66.767,84.631 r303.75 top (schematic designator R2)
R2_NEO13 "4.7KΩ" RES_0603 72.547,76.684 r315 top (schematic designator R2)
R2_NEO14 "4.7KΩ" RES_0603 79.767,70.017 r326.25 top (schematic designator R2)
R2_NEO15 "4.7KΩ" RES_0603 88.148,64.887 r337.5 top (schematic designator R2)
R2_NEO16 "4.7KΩ" RES_0603 97.471,61.493 r348.52 top (schematic designator R2)
R2_NEO17 "4.7KΩ" RES_0603 107.075,59.959 r0 top (schematic designator R2)
R2_NEO18 "4.7KΩ" RES_0603 116.913,60.379 r11.25 top (schematic designator R2)
R2_NEO19 "4.7KΩ" RES_0603 126.484,62.691 r22.5 top (schematic designator R2)
R2_NEO20 "4.7KΩ" RES_0603 135.376,66.802 r33.75 top (schematic designator R2)
R2_NEO21 "4.7KΩ" RES_0603 143.316,72.583 r45 top (schematic designator R2)
R2_NEO22 "4.7KΩ" RES_0603 149.976,79.801 r56.25 top (schematic designator R2)
R2_NEO23 "4.7KΩ" RES_0603 155.099,88.18 r67.5 top (schematic designator R2)
R2_NEO24 "4.7KΩ" RES_0603 158.489,97.398 r78.75 top (schematic designator R2)
R2_NEO25 "4.7KΩ" RES_0603 160.016,107.1 r90 top (schematic designator R2)
R2_NEO26 "4.7KΩ" RES_0603 159.616,116.938 r101.25 top (schematic designator R2)
R2_NEO27 "4.7KΩ" RES_0603 157.259,126.409 r112.5 top (schematic designator R2)
R2_NEO28 "4.7KΩ" RES_0603 153.198,135.376 r123.75 top (schematic designator R2)
R2_NEO29 "4.7KΩ" RES_0603 147.417,143.316 r135 top (schematic designator R2)
R2_NEO30 "4.7KΩ" RES_0603 140.233,149.983 r146.25 top (schematic designator R2)
R2_NEO31 "4.7KΩ" RES_0603 131.852,155.113 r157.5 top (schematic designator R2)
R2_NEO32 "4.7KΩ" RES_0603 122.631,158.509 r168.75 top (schematic designator R2)
R-BOTTOM "RES_0603" RES_0603 110.3,78.5 r90 top
R-LEFT "RES_0603" RES_0603 120.2,110.4 r90 top
R-RIGHT "RES_0603" RES_0603 99.8,110.4 r270 top
R-TOP "RES_0603" RES_0603 110.3,135.5 r270 top
Teensy "Teensy-4.1-TH" TEENSY-4.1-TH 110,103.5 r90 bottom

## Footprints (in the part's own frame and the unit in brackets; to place one, negate y for a bottom-side part, rotate by r counter-clockwise, add the part's x,y. Pads: shape width x height; smd on the part's side, far side on the other; paste and mask are expansions set on the pad)
6PIN [mm]
  round 1.5 hole 1.02: 1(-6.38,0) 2(-3.84,0) 3(-1.3,0) 4(1.24,0) 5(3.78,0) 6(6.32,0)
  rect 0.8x2.4 smd: 1(-6.375,-1.7) 2(-3.835,1.7) 3(-1.295,-1.7) 4(1.245,1.7) 5(3.785,-1.7) 6(6.325,1.7)
ALS-PT19 [mm]
  rect 1x0.9 smd: C(-0.775,0) E(0.775,0)
  silkscreen extent 1.72,-0.38 2.07,0.33, body extent -0.85,-0.41 0.85,0.39, height 0.6
CAP_0603 [mm] "Chip Capacitor, 2-Leads, Body 1.60x0.80mm, IPC Medium Density"
  rect 0.9x0.95 smd: 1(-0.775,0) 2(0.775,0)
  body extent -0.85,-0.45 0.85,0.45, height 0.55
IDC-6PIN-SMT-2.54 [mm] "SOJ, 6-Leads, Body 10.60x10.50mm, Pitch 2.54mm, IPC Low Density"
  rect 5x1.25 smd: 1(-3.225,2.54) 2(-3.225,0) 3(-3.225,-2.54) 4(3.25,-2.54) 5(3.25,0) 6(3.25,2.54)
  silkscreen extent -3.1,-5.3 0.12,5.3, body extent -5.1,-7.61 5.08,7.61, height 10.5
LED1515 [mm]
  rect 0.55x1 smd: DIN(-0.5,-0.7) DOUT(0.5,0.7) GND(-0.5,0.7) VDD(0.5,-0.7)
  silkscreen extent -1.5,0.4 -1.3,0.6, body extent -0.75,-0.75 0.75,0.75, height 0.65
LMV331 [mm]
  rrect25% 1.19x0.4 smd paste+0 mask+0.102: 1(-0.96,0.65) 2(-0.96,0) 3(-0.96,-0.65) 4(0.96,-0.65) 5(0.96,0.65)
  silkscreen extent -2.2,-1.17 0.62,1.17, body extent -1.05,-1 1.05,1, height 1.1
RES_0603 [mm] "Chip Resistor, 2-Leads, Body 1.60x0.80mm, IPC Medium Density"
  rect 0.85x0.9 smd: 1(-0.775,0) 2(0.775,0)
  body extent -0.85,-0.45 0.85,0.45, height 0.55
TEENSY-4.1-TH [mm]
  round 1.308 hole 0.8: 0(-26.67,-7.62) 1(-24.13,-7.62) 2(-21.59,-7.62) 3(-19.05,-7.62) 3V(-24.13,7.62) 3V-1(6.35,-7.62) 4(-16.51,-7.62) 5(-13.97,-7.62) 6(-11.43,-7.62) 7(-8.89,-7.62) 8(-6.35,-7.62) 9(-3.81,-7.62) 10(-1.27,-7.62) 11(1.27,-7.62) 12(3.81,-7.62) 13(3.81,7.62) 14(1.27,7.62) 15(-1.27,7.62) 16(-3.81,7.62) 17(-6.35,7.62) 18(-8.89,7.62) 19(-11.43,7.62) 20(-13.97,7.62) 21(-16.51,7.62) 22(-19.05,7.62) 23(-21.59,7.62) 24(8.89,-7.62) 25(11.43,-7.62) 26(13.97,-7.62) 27(16.51,-7.62) 28(19.05,-7.62) 29(21.59,-7.62) 30(24.13,-7.62) 31(26.67,-7.62) 32(29.21,-7.62) 33(29.21,7.62) 34(26.67,7.62) 35(24.13,7.62) 36(21.59,7.62) 37(19.05,7.62) 38(16.51,7.62) 39(13.97,7.62) 40(11.43,7.62) 41(8.89,7.62) GND(-26.67,7.62) GND1(-29.21,-7.62) GND3(6.35,7.62) VIN(-29.21,7.62)
  silkscreen extent -31.18,-9.6 30.48,8.89, body extent -31.7,-8.9 30.73,8.88, height 15.02

## Part data
C2_NEO1 C2_NEO2 C2_NEO3 C2_NEO4 C2_NEO5 C2_NEO6 C2_NEO7 C2_NEO8 C2_NEO9 C2_NEO10 C2_NEO11 C2_NEO12 C2_NEO13 C2_NEO14 C2_NEO15 C2_NEO16 C2_NEO17 C2_NEO18 C2_NEO19 C2_NEO20 C2_NEO21 C2_NEO22 C2_NEO23 C2_NEO24 C2_NEO25 C2_NEO26 C2_NEO27 C2_NEO28 C2_NEO29 C2_NEO30 C2_NEO31 C2_NEO32: library part CAP_0603, "Capacitor SMD 0603 generic"
R1_NEO1 R1_NEO2 R1_NEO3 R1_NEO4 R1_NEO5 R1_NEO6 R1_NEO7 R1_NEO8 R1_NEO9 R1_NEO10 R1_NEO11 R1_NEO12 R1_NEO13 R1_NEO14 R1_NEO15 R1_NEO16 R1_NEO17 R1_NEO18 R1_NEO19 R1_NEO20 R1_NEO21 R1_NEO22 R1_NEO23 R1_NEO24 R1_NEO25 R1_NEO26 R1_NEO27 R1_NEO28 R1_NEO29 R1_NEO30 R1_NEO31 R1_NEO32 R2_NEO1 R2_NEO2 R2_NEO3 R2_NEO4 R2_NEO5 R2_NEO6 R2_NEO7 R2_NEO8 R2_NEO9 R2_NEO10 R2_NEO11 R2_NEO12 R2_NEO13 R2_NEO14 R2_NEO15 R2_NEO16 R2_NEO17 R2_NEO18 R2_NEO19 R2_NEO20 R2_NEO21 R2_NEO22 R2_NEO23 R2_NEO24 R2_NEO25 R2_NEO26 R2_NEO27 R2_NEO28 R2_NEO29 R2_NEO30 R2_NEO31 R2_NEO32: library part RES_0603, "Resistor SMD 0603 generic"
R-BOTTOM R-LEFT R-RIGHT R-TOP: library part CMP-009-00178-1, "Resistor SMD 0603 generic", Component Type=Standard, Design Item ID=RES_0603, Pins=2, Source=GenericRC.SchLib

## Via types
v1: diameter 0.4, hole 0.3, Top Layer to Bottom Layer, tented both sides, 167 vias
v2: diameter 0.4, hole 0.254, Top Layer to Bottom Layer, tented both sides, 51 vias
v3: diameter 6, hole 3, Top Layer to Bottom Layer, 3 vias

## Nets (pads, with @x,y where several pads share a name; then routed paths per layer and width w, separated by ;. In a path a pad name is that pad's centre, name@x,y a point inside that pad or via, vN(x,y) a via of type N, cw(c..) or ccw(c..) an arc to the next point about the centre after c; other vN are vias at no path point)
+3V3: D1_NEO1.C D1_NEO2.C D1_NEO3.C D1_NEO4.C D1_NEO5.C D1_NEO6.C D1_NEO7.C D1_NEO8.C D1_NEO9.C D1_NEO10.C D1_NEO11.C D1_NEO12.C D1_NEO13.C D1_NEO14.C D1_NEO15.C D1_NEO16.C D1_NEO17.C D1_NEO18.C D1_NEO19.C D1_NEO20.C D1_NEO21.C D1_NEO22.C D1_NEO23.C D1_NEO24.C D1_NEO25.C D1_NEO26.C D1_NEO27.C D1_NEO28.C D1_NEO29.C D1_NEO30.C D1_NEO31.C D1_NEO32.C LM1_NEO1.5 LM1_NEO2.5 LM1_NEO3.5 LM1_NEO4.5 LM1_NEO5.5 LM1_NEO6.5 LM1_NEO7.5 LM1_NEO8.5 LM1_NEO9.5 LM1_NEO10.5 LM1_NEO11.5 LM1_NEO12.5 LM1_NEO13.5 LM1_NEO14.5 LM1_NEO15.5 LM1_NEO16.5 LM1_NEO17.5 LM1_NEO18.5 LM1_NEO19.5 LM1_NEO20.5 LM1_NEO21.5 LM1_NEO22.5 LM1_NEO23.5 LM1_NEO24.5 LM1_NEO25.5 LM1_NEO26.5 LM1_NEO27.5 LM1_NEO28.5 LM1_NEO29.5 LM1_NEO30.5 LM1_NEO31.5 LM1_NEO32.5 PIN1.2 PIN2.2 PIN3.2 R2_NEO1.2 R2_NEO2.2 R2_NEO3.2 R2_NEO4.2 R2_NEO5.2 R2_NEO6.2 R2_NEO7.2 R2_NEO8.2 R2_NEO9.2 R2_NEO10.2 R2_NEO11.2 R2_NEO12.2 R2_NEO13.2 R2_NEO14.2 R2_NEO15.2 R2_NEO16.2 R2_NEO17.2 R2_NEO18.2 R2_NEO19.2 R2_NEO20.2 R2_NEO21.2 R2_NEO22.2 R2_NEO23.2 R2_NEO24.2 R2_NEO25.2 R2_NEO26.2 R2_NEO27.2 R2_NEO28.2 R2_NEO29.2 R2_NEO30.2 R2_NEO31.2 R2_NEO32.2 Teensy.3V Teensy.3V-1 | length 596.5
  Top Layer w0.254: R2_NEO9.2@59.891,112.343 R2_NEO9.2@59.984,112.25 ; v1(59.984,112.125) 60.109,112.25 61.611,112.25 61.684,112.177 D1_NEO9.C@61.684,110.675 ; R2_NEO10.2@60.397,102.522 R2_NEO10.2@60.506,102.449 ; v1(60.53,102.327) 60.629,102.474 62.102,102.767 62.188,102.709 D1_NEO10.C@62.481,101.236 ; R2_NEO8.2@61.291,122.103 R2_NEO8.2@61.364,121.994 ; v1(61.34,121.871) 61.487,121.969 62.96,121.676 63.017,121.591 D1_NEO8.C@62.724,120.117 ; R2_NEO11.2@62.809,92.989 R2_NEO11.2@62.93,92.938 ; v1(62.978,92.823) 63.046,92.986 64.433,93.561 64.529,93.522 D1_NEO11.C@65.104,92.134 ; R2_NEO7.2@64.602,131.34 R2_NEO7.2@64.652,131.219 ; v1(64.604,131.104) 64.768,131.171 66.155,130.596 66.195,130.501 D1_NEO7.C@65.62,129.113 ; R2_NEO12.2@67,84.116 R2_NEO12.2@67.129,84.09 ; v1(67.198,83.986) 67.232,84.16 68.481,84.994 68.583,84.974 D1_NEO12.C@69.417,83.725 ; v1(69.594,139.544) 69.767,139.579 71.016,138.744 71.036,138.643 D1_NEO6.C@70.201,137.394 ; R2_NEO6.2@69.638,139.777 R2_NEO6.2@69.663,139.648 ; R2_NEO13.2@72.876,76.224 R2_NEO13.2@73.007,76.224 ; v1(73.095,76.136) 73.095,76.313 74.157,77.375 74.261,77.375 D1_NEO13.C@75.323,76.313 ; v1(76.133,146.901) 76.31,146.901 77.372,145.839 77.372,145.736 D1_NEO5.C@76.31,144.674 ; R2_NEO5.2@76.222,146.99 R2_NEO5.2@76.222,147.121 ; R2_NEO14.2@80.178,69.631 R2_NEO14.2@80.307,69.656 ; v1(80.411,69.587) 80.377,69.76 81.211,71.009 81.312,71.029 D1_NEO14.C@82.561,70.195 ; D1_NEO4.C@83.702,150.52 84.95,151.354 84.971,151.456 84.136,152.704 v1(83.963,152.739) ; R2_NEO4.2@84.067,152.808 R2_NEO4.2@84.092,152.937 ; R2_NEO15.2@88.627,64.588 R2_NEO15.2@88.748,64.639 ; v1(88.864,64.591) 88.796,64.754 89.371,66.142 89.466,66.181 D1_NEO15.C@90.854,65.607 ; D1_NEO3.C@92.147,154.929 93.535,155.504 93.575,155.599 93,156.987 v1(92.836,157.054) ; R2_NEO3.2@92.952,157.102 R2_NEO3.2@93.002,157.224 ; R2_NEO16.2@97.998,61.291 R2_NEO16.2@98.108,61.364 ; v1(98.23,61.339) 98.133,61.486 98.432,62.958 98.518,63.015 D1_NEO16.C@99.99,62.716 ; D1_NEO2.C@101.236,157.52 102.709,157.813 102.766,157.899 102.473,159.372 v1(102.326,159.47) ; PIN2.2@106.16,68 106.398,68.238 106.398,68.698 110.3,72.6 v1(110.3,75.8) ; R2_NEO17.2@107.632,59.866 R2_NEO17.2@107.725,59.959 ; v1(107.85,59.959) 107.725,60.084 107.725,61.586 107.798,61.659 D1_NEO17.C@109.3,61.659 ; D1_NEO1.C@110.7,158.316 112.202,158.316 112.275,158.389 112.275,159.891 v1(112.15,160.016) 112.448,160.314 112.448,160.973 112.65,161.175 114.625,161.175 115.3,160.5 v1(115.3,152.1) ; R2_NEO18.2@117.478,60.397 R2_NEO18.2@117.551,60.506 ; v1(117.673,60.53) 117.526,60.629 117.233,62.102 117.291,62.188 D1_NEO18.C@118.764,62.481 ; D1_NEO32.C@120.117,157.276 121.591,156.983 121.676,157.04 121.969,158.513 v1(121.871,158.66) ; v1(121.2,109.2) 149.6,109.2 PIN3.2@151.988,106.812 ; R2_NEO32.2@121.994,158.636 R2_NEO32.2@122.103,158.709 ; R2_NEO19.2@127.034,62.818 R2_NEO19.2@127.085,62.94 ; v1(127.2,62.988) 127.037,63.055 126.462,64.443 126.502,64.538 D1_NEO19.C@127.889,65.113 ; D1_NEO31.C@129.146,154.393 130.534,153.819 130.629,153.858 131.204,155.246 v1(131.136,155.409) ; R2_NEO31.2@131.252,155.361 R2_NEO31.2@131.373,155.412 ; R2_NEO20.2@135.891,67.034 R2_NEO20.2@135.917,67.163 ; v1(136.021,67.233) 135.847,67.267 135.013,68.516 135.033,68.617 D1_NEO20.C@136.282,69.452 ; D1_NEO30.C@137.439,149.805 138.688,148.971 138.789,148.991 139.623,150.24 v1(139.589,150.413) ; R2_NEO30.2@139.693,150.344 R2_NEO30.2@139.822,150.369 ; D1_NEO21.C@143.687,75.358 142.625,74.296 142.625,74.193 143.687,73.131 v1(143.864,73.131) ; R2_NEO21.2@143.776,72.911 R2_NEO21.2@143.776,73.042 ; D1_NEO29.C@144.642,143.687 145.704,142.625 145.807,142.625 146.869,143.687 v1(146.869,143.864) ; R2_NEO29.2@146.958,143.776 R2_NEO29.2@147.089,143.776 ; D1_NEO22.C@149.798,82.596 148.964,81.347 148.984,81.246 150.233,80.411 v1(150.406,80.446) ; R2_NEO22.2@150.337,80.342 R2_NEO22.2@150.362,80.213 ; D1_NEO28.C@150.548,136.282 151.383,135.033 151.484,135.013 152.733,135.847 v1(152.767,136.021) ; R2_NEO28.2@152.837,135.917 R2_NEO28.2@152.966,135.891 ; D1_NEO23.C@154.38,90.887 153.805,89.499 153.845,89.404 155.232,88.829 v1(155.396,88.896) ; D1_NEO27.C@154.837,127.814 155.412,126.427 155.507,126.387 156.895,126.962 v1(156.962,127.125) ; R2_NEO23.2@155.348,88.781 R2_NEO23.2@155.398,88.66 ; R2_NEO27.2@157.01,127.01 R2_NEO27.2@157.132,126.959 ; D1_NEO24.C@157.256,99.912 156.963,98.439 157.02,98.353 158.493,98.06 v1(158.64,98.158) ; D1_NEO26.C@157.514,118.788 157.807,117.315 157.893,117.258 159.366,117.551 v1(159.465,117.698) ; D1_NEO25.C@158.316,109.325 158.316,107.823 158.389,107.75 159.891,107.75 v1(160.016,107.875) ; R2_NEO24.2@158.616,98.036 R2_NEO24.2@158.689,97.926 ; R2_NEO26.2@159.489,117.575 R2_NEO26.2@159.598,117.502 ; R2_NEO25.2@160.016,107.75 R2_NEO25.2@160.109,107.657
  Bottom Layer w0.254: PIN1.2@67.024,113.84 72.16,113.84 76.15,109.85 Teensy.3V-1@102.38,109.85 ; v1(110.3,75.8) 110.3,76.17 113.5,79.37 ; v1(112.15,160.016) v1(102.326,159.47) v1(92.836,157.054) v1(83.963,152.739) v1(76.133,146.901) v1(69.594,139.544) v1(64.604,131.104) v1(61.34,121.871) v1(59.984,112.125) v1(60.53,102.327) v1(62.978,92.823) v1(67.198,83.986) v1(73.095,76.136) v1(80.411,69.587) v1(88.864,64.591) v1(98.23,61.339) v1(107.85,59.959) v1(117.673,60.53) v1(127.2,62.988) v1(136.021,67.233) v1(143.864,73.131) v1(150.406,80.446) v1(155.396,88.896) v1(158.64,98.158) v1(160.016,107.875) v1(159.465,117.698) v1(156.962,127.125) v1(152.767,136.021) v1(146.869,143.864) v1(139.589,150.413) v1(131.136,155.409) v1(121.871,158.66) ; v1(115.3,152.1) 113.6,150.4 113.6,134.8 112.675,133.875 112.675,108 ; Teensy.3V@117.62,79.37 113.5,79.37 ; v1(121.2,109.2) 120.525,108.525 113.2,108.525 112.675,108 ; 112.675,108 112.675,80.195 113.5,79.37
+5V: JLINE.3 NEO1_NEO1.VDD NEO1_NEO2.VDD NEO1_NEO3.VDD NEO1_NEO4.VDD NEO1_NEO5.VDD NEO1_NEO6.VDD NEO1_NEO7.VDD NEO1_NEO8.VDD NEO1_NEO9.VDD NEO1_NEO10.VDD NEO1_NEO11.VDD NEO1_NEO12.VDD NEO1_NEO13.VDD NEO1_NEO14.VDD NEO1_NEO15.VDD NEO1_NEO16.VDD NEO1_NEO17.VDD NEO1_NEO18.VDD NEO1_NEO19.VDD NEO1_NEO20.VDD NEO1_NEO21.VDD NEO1_NEO22.VDD NEO1_NEO23.VDD NEO1_NEO24.VDD NEO1_NEO25.VDD NEO1_NEO26.VDD NEO1_NEO27.VDD NEO1_NEO28.VDD NEO1_NEO29.VDD NEO1_NEO30.VDD NEO1_NEO31.VDD NEO1_NEO32.VDD PIN1.6 PIN2.6 PIN3.6 | length 542.3
  Top Layer w0.4: v1(110.5,162.291) 115.209,162.291
  Top Layer w0.5: 115.209,162.291 116.2,161.3 v1(116.2,154.1)
  Bottom Layer w0.4: 67.285,102.608 67.567,95.897 70.644,88.47 74.9,82.1 82.297,74.703 88.461,70.584 95.907,67.5 97.9,67.5 102.1,71.7 114.027,71.7 116,69.727 116,68.784 116.11,68.675 116.11,68.21 PIN2.6@116.32,68 ; 67.285,102.599 67.285,102.668 68,103.382 PIN1.6@68,103.68 ; v1(116.2,154.1) 116.596,153.955 124.39,152.237 131.801,149.167 138.495,144.695 138.555,144.645 144.682,138.518 149.696,131.015 152.339,124.632 ; PIN2.6@116.32,67.5 120.352,67.5 124.147,67.705 131.702,70.835 138.699,75.51 138.759,75.559 144.995,81.795 149.285,88.216 152.658,96.359 152.649,96.826 147.75,104.28 ; JLINE.3@144.225,107.46 JLINE.3@146.1,107.46 ; 147.756,104.271 147.523,104.504 147.523,106.037 JLINE.3@146.1,107.46 ; PIN3.6@152,116.32 152,120.551 152.345,120.896 152.345,124.619 ; PIN3.6@152.981,116.3 152.958,116.323 152.023,116.323 152,116.3 148.424,116.3 147.523,115.399 147.523,108.883 JLINE.3@146.1,107.46
  Bottom Layer w0.5: v1(110.5,162.291) v1(100.264,161.379) v1(90.441,158.525) v1(81.327,153.714) v1(73.358,147.343) v1(66.786,139.437) v1(61.871,130.45) v1(58.787,120.697) v1(57.709,110.475) v1(58.621,100.264) v1(61.508,90.428) v1(66.223,81.351) v1(72.653,73.361) v1(80.519,66.779) v1(89.518,61.858) v1(99.395,58.781) v1(109.5,57.684) v1(119.736,58.621) v1(129.595,61.517) v1(138.656,66.258) v1(146.639,72.689) v1(153.214,80.554) v1(158.129,89.55) v1(161.194,99.333) v1(162.291,109.525) v1(161.374,119.76) v1(158.433,129.52) v1(153.742,138.656) v1(147.311,146.639) v1(139.481,153.221) v1(130.482,158.142) v1(120.697,161.213)
+BAT: JLINE.4 Teensy.VIN | length 46.1
  Bottom Layer w0.4: Teensy.VIN@117.62,74.29 119.496,76.166 119.496,96.996 129.96,107.46 JLINE.4@137.75,107.46
+VREF: C2_NEO1.2 C2_NEO2.2 C2_NEO3.2 C2_NEO4.2 C2_NEO5.2 C2_NEO6.2 C2_NEO7.2 C2_NEO8.2 C2_NEO9.2 C2_NEO10.2 C2_NEO11.2 C2_NEO12.2 C2_NEO13.2 C2_NEO14.2 C2_NEO15.2 C2_NEO16.2 C2_NEO17.2 C2_NEO18.2 C2_NEO19.2 C2_NEO20.2 C2_NEO21.2 C2_NEO22.2 C2_NEO23.2 C2_NEO24.2 C2_NEO25.2 C2_NEO26.2 C2_NEO27.2 C2_NEO28.2 C2_NEO29.2 C2_NEO30.2 C2_NEO31.2 C2_NEO32.2 LM1_NEO1.3 LM1_NEO2.3 LM1_NEO3.3 LM1_NEO4.3 LM1_NEO5.3 LM1_NEO6.3 LM1_NEO7.3 LM1_NEO8.3 LM1_NEO9.3 LM1_NEO10.3 LM1_NEO11.3 LM1_NEO12.3 LM1_NEO13.3 LM1_NEO14.3 LM1_NEO15.3 LM1_NEO16.3 LM1_NEO17.3 LM1_NEO18.3 LM1_NEO19.3 LM1_NEO20.3 LM1_NEO21.3 LM1_NEO22.3 LM1_NEO23.3 LM1_NEO24.3 LM1_NEO25.3 LM1_NEO26.3 LM1_NEO27.3 LM1_NEO28.3 LM1_NEO29.3 LM1_NEO30.3 LM1_NEO31.3 LM1_NEO32.3 PIN1.4 PIN2.4 PIN3.4 R-BOTTOM.1 R-LEFT.2 R-RIGHT.1 R-TOP.1 | length 377.2
  Top Layer w0.254: v1(63.344,113.55) 64.35,113.55 65.4,112.5 65.4,110.9 67.302,108.998 67.762,108.998 PIN1.4@68,108.76 97.36,108.76 99.775,111.175 R-RIGHT.1@99.8,111.175 ; v1(106.425,63.319) 106.425,64.925 107.3,65.8 109.04,65.8 PIN2.4@111.24,68 111.24,76.785 110.623,77.402 110.623,77.427 110.325,77.725 R-BOTTOM.1@110.3,77.725 ; R-TOP.1@110.3,136.275 110.3,150.9 113.575,154.175 v1(113.575,156.656) ; R-LEFT.2@120.1,111.175 120.165,111.24 PIN3.4@152,111.24 153.86,111.24 154.6,110.5 154.6,107 155.15,106.45 156.188,106.45 v1(156.656,106.45)
  Bottom Layer w0.254: C2_NEO6.2@73.193,138.893 73.175,138.864 68.264,131.157 v1(68.254,131.134) 64.938,122.608 63.344,113.575 v1(63.344,113.55) 63.543,104.404 v1(63.548,104.38) 65.527,95.448 v1(65.537,95.425) 69.221,87.052 C2_NEO13.2@74.481,79.537 ; C2_NEO5.2@79.537,145.519 87.007,150.748 87.052,150.779 95.448,154.473 v1(104.38,156.452) C2_NEO2.2@104.384,156.453 ; C2_NEO14.2@81.107,73.193 88.843,68.264 97.497,64.901 97.5,64.9 106.425,63.344 C2_NEO18.2@115.372,63.4 ; v1(104.38,156.452) C2_NEO2.2@104.384,156.453 ; C2_NEO2.2@104.404,156.457 C2_NEO2.2@104.384,156.453 ; C2_NEO18.2@115.617,63.451 115.642,63.456 124.552,65.527 v1(124.598,65.547) 132.948,69.221 v1(132.969,69.235) C2_NEO21.2@140.463,74.481 ; C2_NEO32.2@122.608,155.062 131.157,151.736 C2_NEO30.2@138.893,146.807 ; v1(122.613,155.087) v1(113.575,156.656) C2_NEO2.2@104.384,156.453 ; C2_NEO29.2@145.519,140.463 v1(150.765,132.969) 150.779,132.948 154.472,124.553 154.473,124.552 154.475,124.539 v1(156.447,115.645) 156.457,115.596 156.655,106.45 156.656,106.425 v1(155.067,97.416) 155.062,97.392 151.745,88.866 151.736,88.843 v1(146.821,81.128) C2_NEO22.2@146.807,81.107
  other v1: 115.62,63.548 97.503,64.915 88.833,68.24 81.093,73.172 140.481,74.499 74.464,79.519 69.2,87.038 151.746,88.866 64.913,122.613 154.403,124.523 73.179,138.862 145.501,140.481 79.517,145.533 138.907,146.828 87.014,150.737 131.167,151.76 95.439,154.496
COMP1: LM1_NEO1.4 R2_NEO1.1 Teensy.36 | length 38.4
  Top Layer w0.254: R2_NEO1.1@113.7,160.016 113.525,159.841 113.525,158.626 113.525,158.231 113.648,158.108 114.043,158.108 114.5,157.651 114.5,152.8 112.7,151 112.7,130.01 Teensy.36@117.62,125.09
COMP2: LM1_NEO2.4 R2_NEO2.1 Teensy.29 | length 39.5
  Top Layer w0.254: Teensy.29@102.38,125.09 103.89,125.09 107.8,129 107.8,153.211 105.128,155.884 ; R2_NEO2.1@103.847,159.772 103.709,159.567 103.946,158.375 103.956,158.326 104.023,157.987 104.168,157.891 104.555,157.968 104.829,157.153 cw(c104.42,157.016) 104.843,157.1 105.056,156.031 cw(c104.633,155.947) 105.061,155.999
COMP3: LM1_NEO3.4 R2_NEO3.1 Teensy.30 | length 38.4
  Top Layer w0.254: R2_NEO3.1@94.268,157.648 94.174,157.419 94.639,156.296 94.79,155.932 94.951,155.865 95.316,156.016 96.748,155.423 106.2,149.087 106.2,131.45 Teensy.30@102.38,127.63